# Altium PCB DiPho_digital.PcbDoc (part 1 of 3)
Units mm, origin at the board's own origin, x right, y up, seen from the top; angles counter-clockwise.
Board outline 25.2 x 25.2 mm, 4 copper layers (Top Layer, GND, Inner Layer 2, Bottom Layer), stack 1.562 mm thick; 68 components, 54 nets, 272 pads, 116 vias.
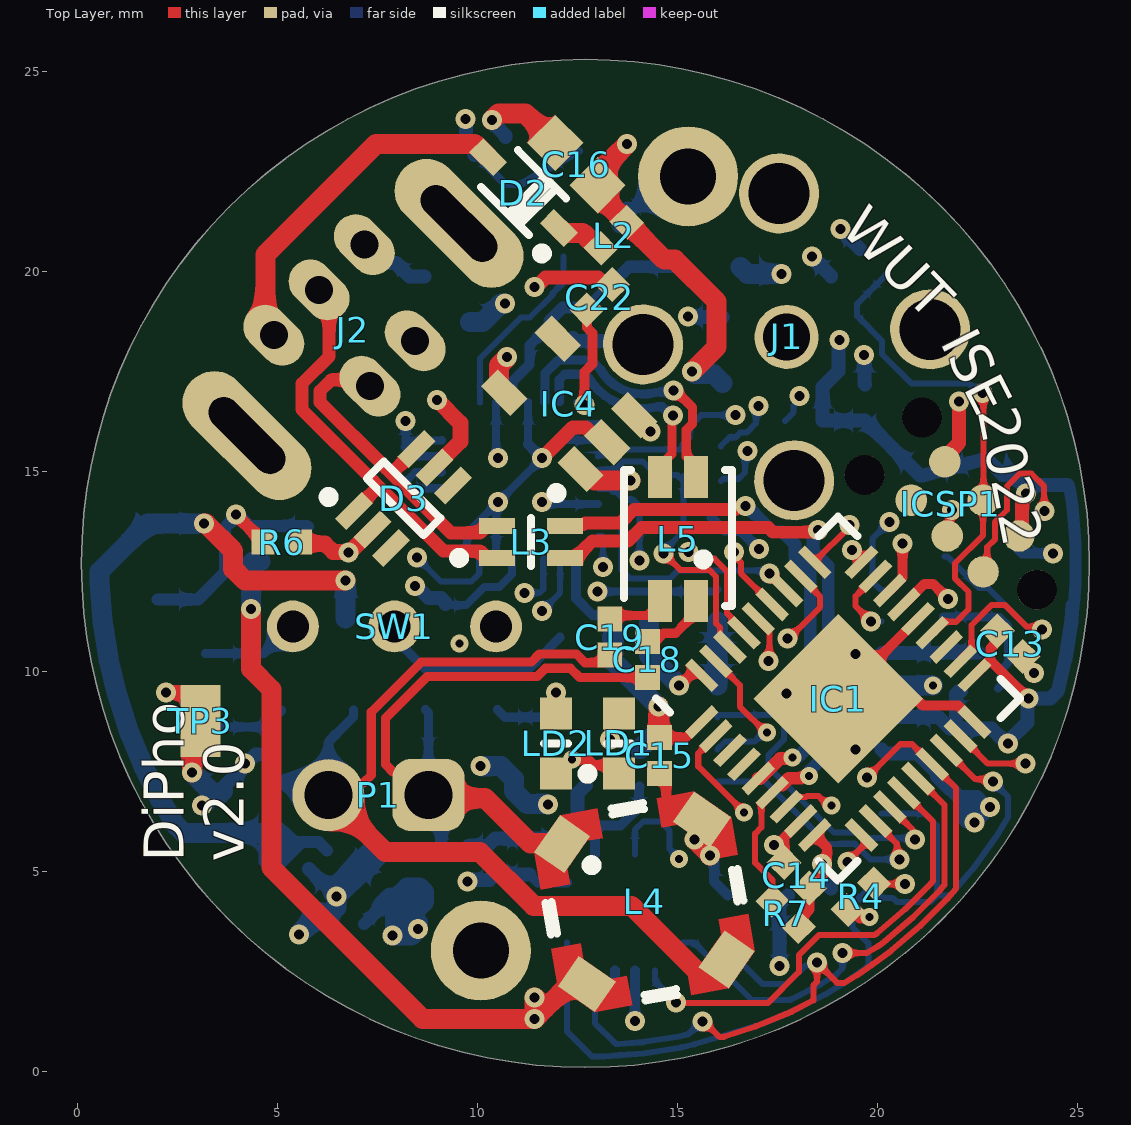
[diagram p0: Top Layer view]
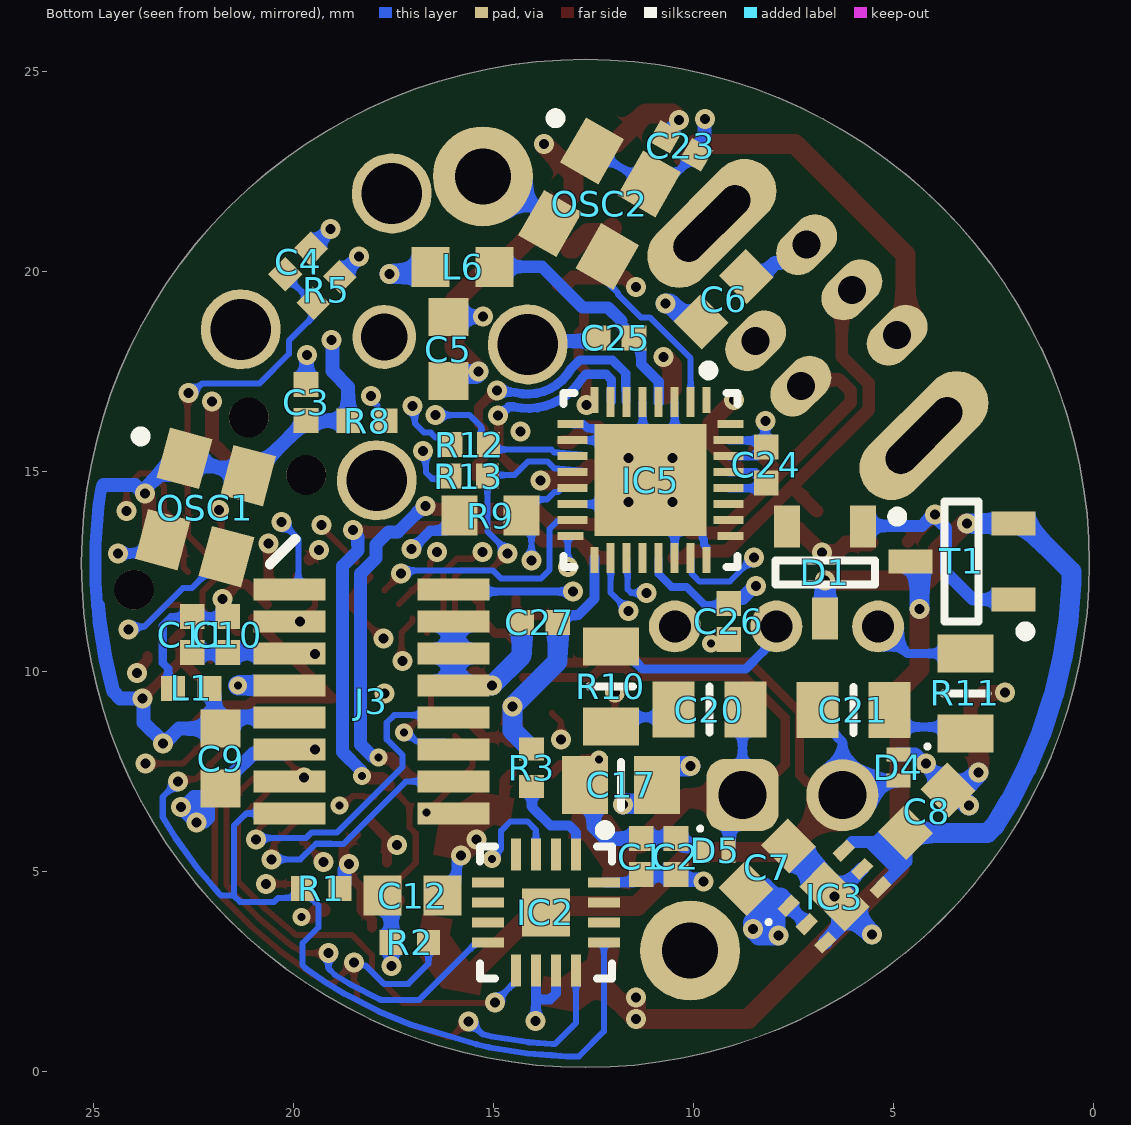
[diagram p1: Bottom Layer view, seen from below]
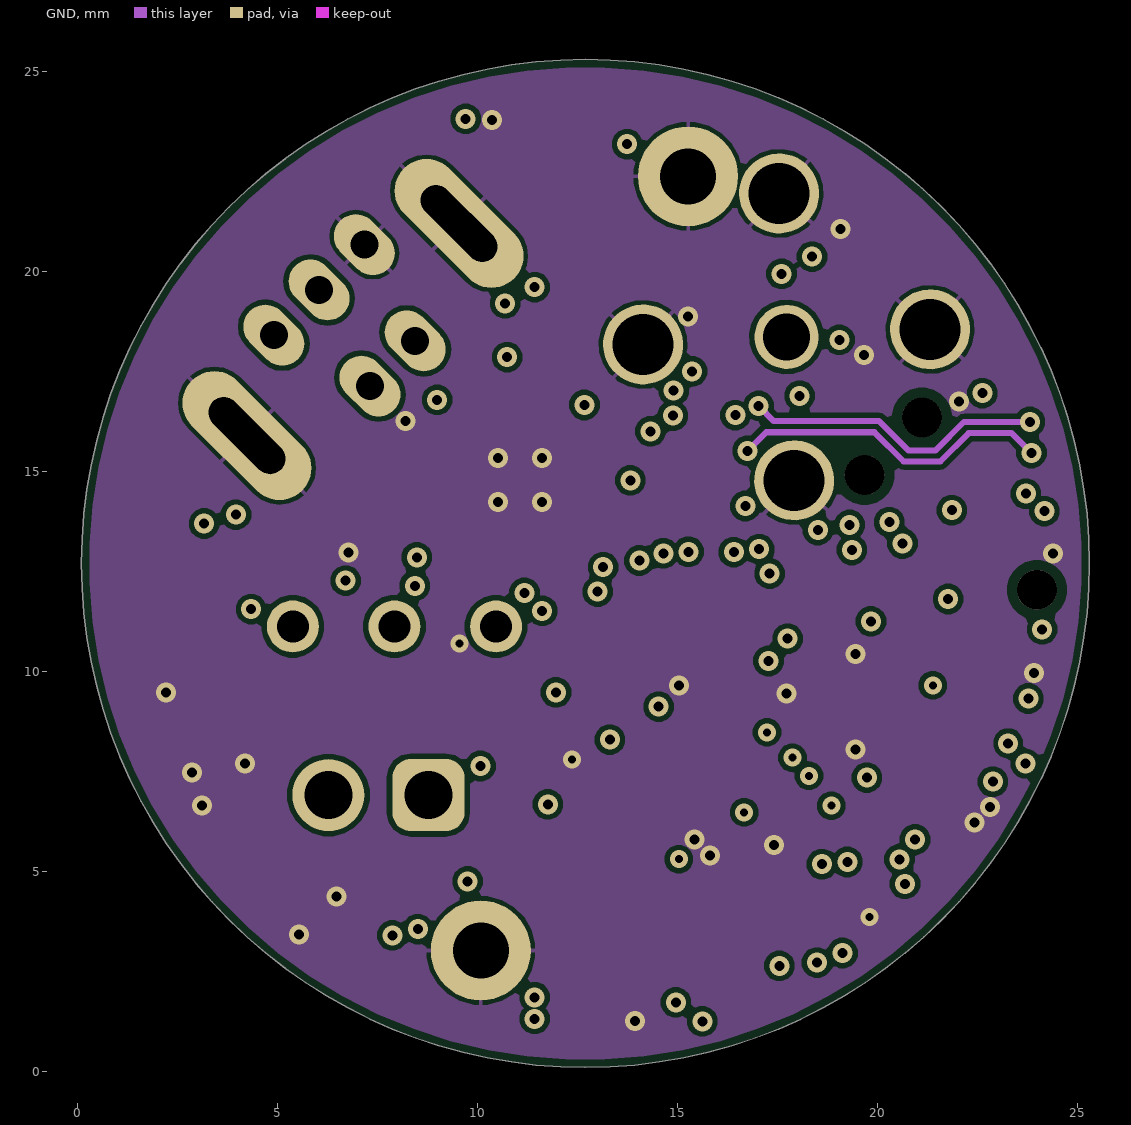
[diagram p2: GND]
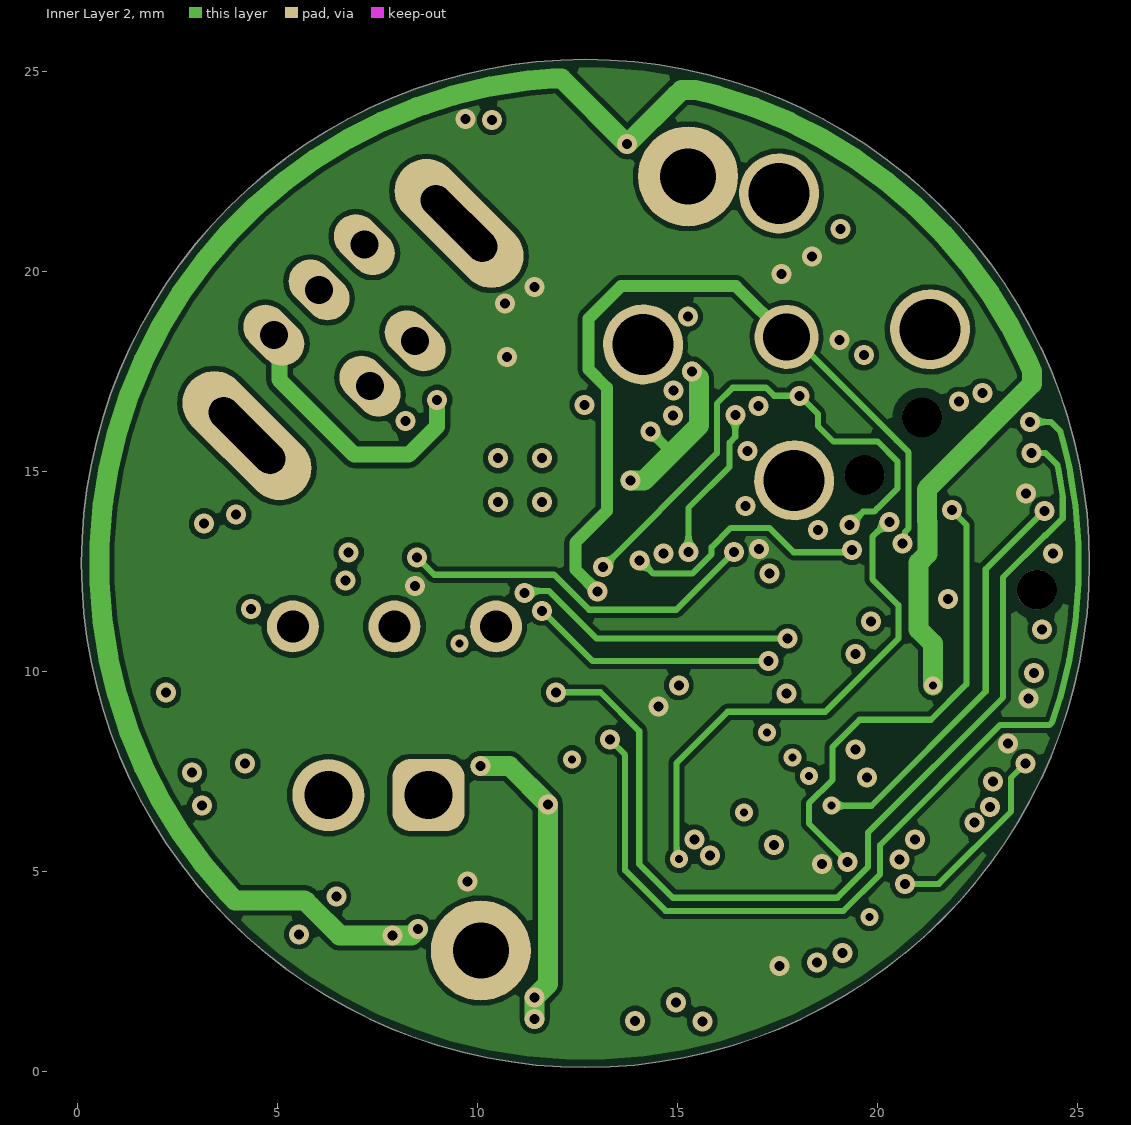
[diagram p3: Inner Layer 2]
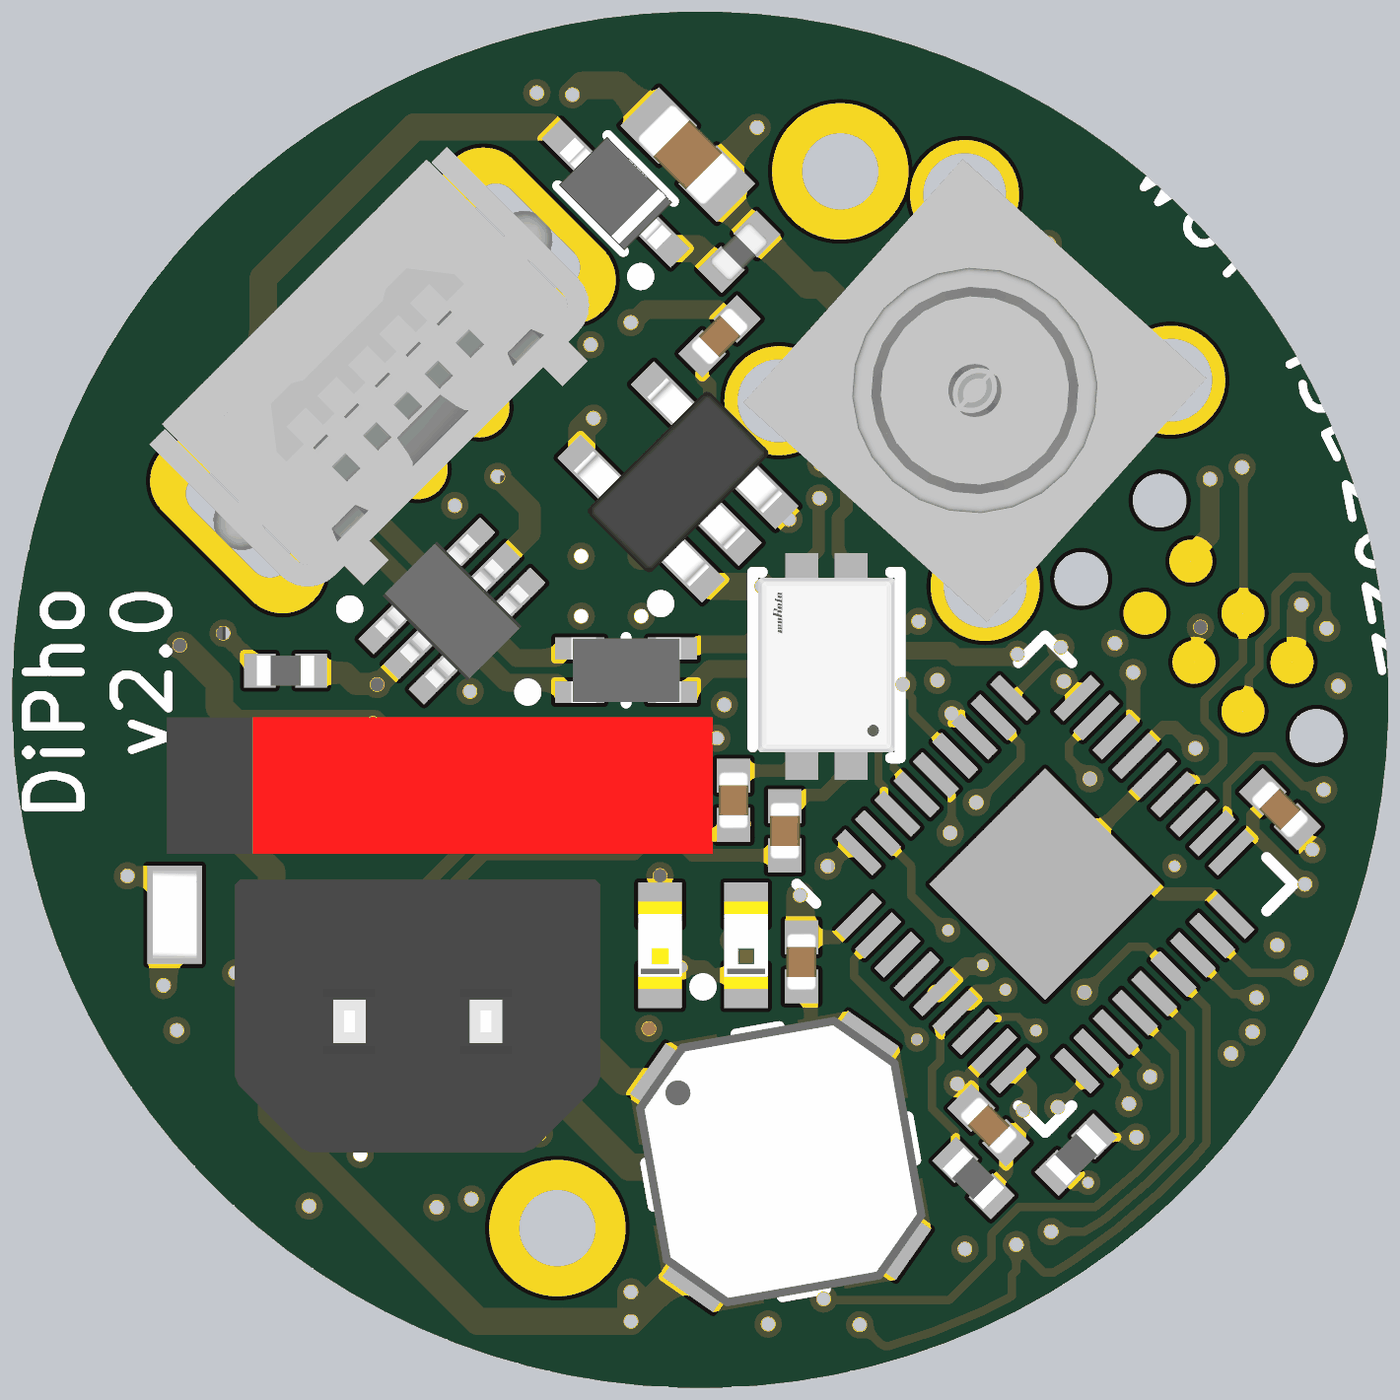
[diagram p5: 3D render of the assembled board from above, using the file's embedded part models]
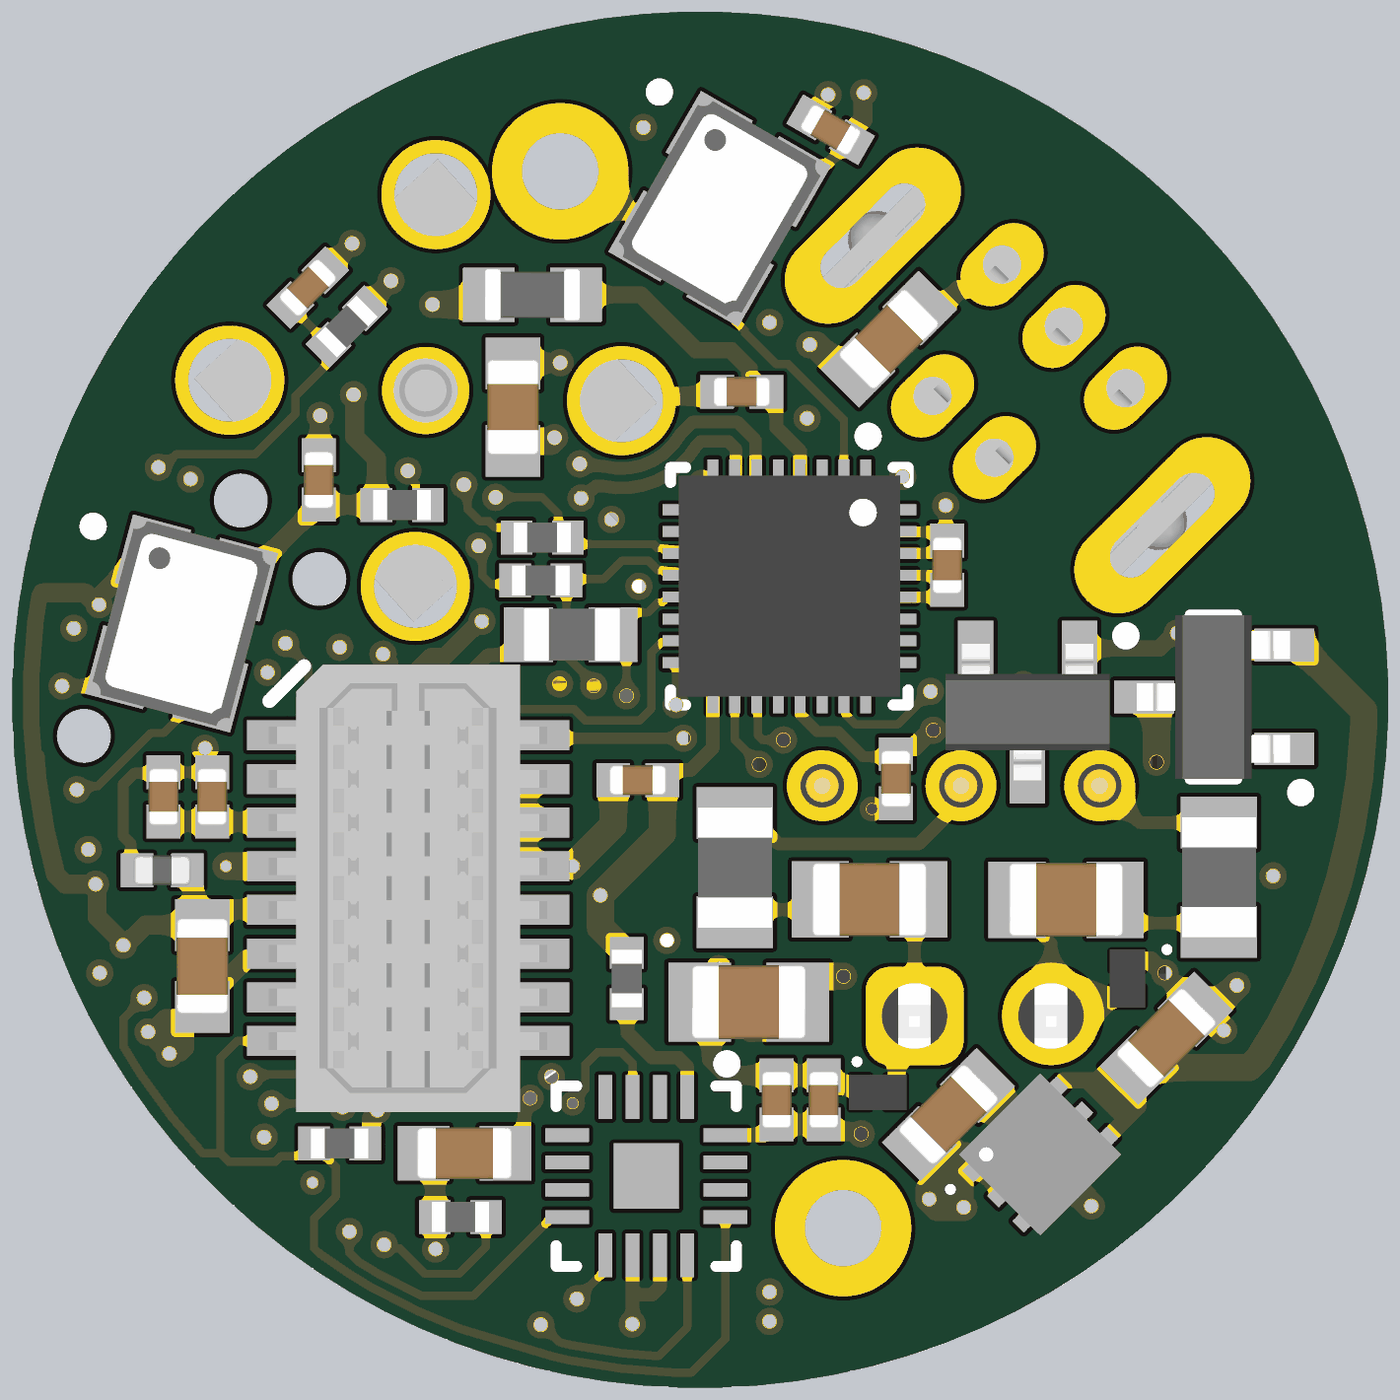
[diagram p6: 3D render of the assembled board from below, using the file's embedded part models]

## Layer stack, top to bottom
Top Solder: solder mask 0.0102, Solder Resist, Dk 3.5
Top Layer: signal copper 0.035
Dielectric 1: prepreg 0.356, PP-006, Dk 4.4
GND: signal copper 0.035
Dielectric 2: dielectric 0.71, FR-4, Dk 3.9
Inner Layer 2: signal copper 0.035
Dielectric 3: prepreg 0.356, PP-006, Dk 4.4
Bottom Layer: signal copper 0.035
Bottom Solder: solder mask 0.0102, Solder Resist, Dk 3.5

## Board outline
12.7,0.1 cw(c12.7,12.7) 0.1,12.7 cw(c12.7,12.7) 12.7,25.3 cw(c12.7,12.7) 25.3,12.7 cw(c12.7,12.7)

## Design rules (kind name [scope] priority, off if disabled: settings)
AcuteAngle [All] p1: minimum=6.00000000000000E+0001 checktracksonly=FALSE
BoardOutlineClearance [All] p1: gap=0.2 ignorepadtopadclearanceinfootprint=FALSE
Clearance Clearance_ViaInPadThermal [IsPad and InNet('GND') vs IsVia] p1: gap=0 ignorepadtopadclearanceinfootprint=FALSE except(-1: SMDPad-Via THPad-Via)
Clearance Clearance_ViaInPad [IsPad vs IsVia] p2: gap=0 ignorepadtopadclearanceinfootprint=FALSE except(0.01: SMDPad-Via)
Clearance [All] p3: gap=0.127 ignorepadtopadclearanceinfootprint=FALSE except(0.25: Arc-Hole Track-Hole SMDPad-Hole THPad-Hole Via-Hole Fill-Hole Poly-Hole Region-Hole Text-Hole)
ComponentClearance [All] p1: gap=0.102 collisioncheckmode=3 verticalgap=0.102 showdistances=TRUE
DiffPairsRouting "Schematic Differential Pairs Routing_9" [InNet('USBJ_D_P')] p1: maxlimit=0.127 minlimit=0.127 mostfreqgap=0.127 toplayer_minwidth=0.323 toplayer_maxwidth=0.323 toplayer_prefwidth=0.323 midlayer1_minwidth=0.14 midlayer1_maxwidth=0.14 midlayer1_prefwidth=0.14 midlayer2_minwidth=0.14 midlayer2_maxwidth=0.14 midlayer2_prefwidth=0.14 bottomlayer_minwidth=0.323 bottomlayer_maxwidth=0.323 bottomlayer_prefwidth=0.323 impedanceprofiledriven=TRUE impedanceprofileid={8D4277C8-22E8-44B8-81B9-C39E21E3F32A} impedanceprofilevalue=90.000000 maxuncoupledlength=2.54
DiffPairsRouting "Schematic Differential Pairs Routing_8" [InNet('USBJ_D_N')] p2: maxlimit=0.127 minlimit=0.127 mostfreqgap=0.127 toplayer_minwidth=0.323 toplayer_maxwidth=0.323 toplayer_prefwidth=0.323 midlayer1_minwidth=0.14 midlayer1_maxwidth=0.14 midlayer1_prefwidth=0.14 midlayer2_minwidth=0.14 midlayer2_maxwidth=0.14 midlayer2_prefwidth=0.14 bottomlayer_minwidth=0.323 bottomlayer_maxwidth=0.323 bottomlayer_prefwidth=0.323 impedanceprofiledriven=TRUE impedanceprofileid={8D4277C8-22E8-44B8-81B9-C39E21E3F32A} impedanceprofilevalue=90.000000 maxuncoupledlength=2.54
DiffPairsRouting "Schematic Differential Pairs Routing_7" [InNet('USBM_D_P')] p3: maxlimit=0.127 minlimit=0.127 mostfreqgap=0.127 toplayer_minwidth=0.323 toplayer_maxwidth=0.323 toplayer_prefwidth=0.323 midlayer1_minwidth=0.14 midlayer1_maxwidth=0.14 midlayer1_prefwidth=0.14 midlayer2_minwidth=0.14 midlayer2_maxwidth=0.14 midlayer2_prefwidth=0.14 bottomlayer_minwidth=0.323 bottomlayer_maxwidth=0.323 bottomlayer_prefwidth=0.323 impedanceprofiledriven=TRUE impedanceprofileid={8D4277C8-22E8-44B8-81B9-C39E21E3F32A} impedanceprofilevalue=90.000000 maxuncoupledlength=2.54
DiffPairsRouting "Schematic Differential Pairs Routing_6" [InNet('USBM_D_N')] p4: maxlimit=0.127 minlimit=0.127 mostfreqgap=0.127 toplayer_minwidth=0.323 toplayer_maxwidth=0.323 toplayer_prefwidth=0.323 midlayer1_minwidth=0.14 midlayer1_maxwidth=0.14 midlayer1_prefwidth=0.14 midlayer2_minwidth=0.14 midlayer2_maxwidth=0.14 midlayer2_prefwidth=0.14 bottomlayer_minwidth=0.323 bottomlayer_maxwidth=0.323 bottomlayer_prefwidth=0.323 impedanceprofiledriven=TRUE impedanceprofileid={8D4277C8-22E8-44B8-81B9-C39E21E3F32A} impedanceprofilevalue=90.000000 maxuncoupledlength=2.54
DiffPairsRouting "Schematic Differential Pairs Routing_5" [InNet('ETH_LINE_DCFILT_P')] p5: maxlimit=0.127 minlimit=0.127 mostfreqgap=0.127 toplayer_minwidth=0.231 toplayer_maxwidth=0.231 toplayer_prefwidth=0.231 midlayer1_minwidth=0.089 midlayer1_maxwidth=0.089 midlayer1_prefwidth=0.089 midlayer2_minwidth=0.089 midlayer2_maxwidth=0.089 midlayer2_prefwidth=0.089 bottomlayer_minwidth=0.231 bottomlayer_maxwidth=0.231 bottomlayer_prefwidth=0.231 impedanceprofiledriven=TRUE impedanceprofileid={9262DCC5-21B2-42F0-AE62-9C07079FD9D1} impedanceprofilevalue=100.000000 maxuncoupledlength=12.7
DiffPairsRouting "Schematic Differential Pairs Routing_4" [InNet('ETH_LINE_N')] p6: maxlimit=0.127 minlimit=0.127 mostfreqgap=0.127 toplayer_minwidth=0.231 toplayer_maxwidth=0.231 toplayer_prefwidth=0.231 midlayer1_minwidth=0.089 midlayer1_maxwidth=0.089 midlayer1_prefwidth=0.089 midlayer2_minwidth=0.089 midlayer2_maxwidth=0.089 midlayer2_prefwidth=0.089 bottomlayer_minwidth=0.231 bottomlayer_maxwidth=0.231 bottomlayer_prefwidth=0.231 impedanceprofiledriven=TRUE impedanceprofileid={9262DCC5-21B2-42F0-AE62-9C07079FD9D1} impedanceprofilevalue=100.000000 maxuncoupledlength=12.7
DiffPairsRouting "Schematic Differential Pairs Routing_3" [InNet('ETH_LINE_P')] p7: maxlimit=0.127 minlimit=0.127 mostfreqgap=0.127 toplayer_minwidth=0.231 toplayer_maxwidth=0.231 toplayer_prefwidth=0.231 midlayer1_minwidth=0.089 midlayer1_maxwidth=0.089 midlayer1_prefwidth=0.089 midlayer2_minwidth=0.089 midlayer2_maxwidth=0.089 midlayer2_prefwidth=0.089 bottomlayer_minwidth=0.231 bottomlayer_maxwidth=0.231 bottomlayer_prefwidth=0.231 impedanceprofiledriven=TRUE impedanceprofileid={9262DCC5-21B2-42F0-AE62-9C07079FD9D1} impedanceprofilevalue=100.000000 maxuncoupledlength=12.7
DiffPairsRouting "Schematic Differential Pairs Routing_2" [InNet('ETH_LINE_CFILT_P')] p8: maxlimit=0.127 minlimit=0.127 mostfreqgap=0.127 toplayer_minwidth=0.231 toplayer_maxwidth=0.231 toplayer_prefwidth=0.231 midlayer1_minwidth=0.089 midlayer1_maxwidth=0.089 midlayer1_prefwidth=0.089 midlayer2_minwidth=0.089 midlayer2_maxwidth=0.089 midlayer2_prefwidth=0.089 bottomlayer_minwidth=0.231 bottomlayer_maxwidth=0.231 bottomlayer_prefwidth=0.231 impedanceprofiledriven=TRUE impedanceprofileid={9262DCC5-21B2-42F0-AE62-9C07079FD9D1} impedanceprofilevalue=100.000000 maxuncoupledlength=12.7
DiffPairsRouting "Schematic Differential Pairs Routing_1" [InNet('ETH_LINE_CFILT_N')] p9: maxlimit=0.127 minlimit=0.127 mostfreqgap=0.127 toplayer_minwidth=0.231 toplayer_maxwidth=0.231 toplayer_prefwidth=0.231 midlayer1_minwidth=0.089 midlayer1_maxwidth=0.089 midlayer1_prefwidth=0.089 midlayer2_minwidth=0.089 midlayer2_maxwidth=0.089 midlayer2_prefwidth=0.089 bottomlayer_minwidth=0.231 bottomlayer_maxwidth=0.231 bottomlayer_prefwidth=0.231 impedanceprofiledriven=TRUE impedanceprofileid={9262DCC5-21B2-42F0-AE62-9C07079FD9D1} impedanceprofilevalue=100.000000 maxuncoupledlength=12.7
DiffPairsRouting "Schematic Differential Pairs Routing" [InNet('ETH_LINE_DCFILT_N')] p10: maxlimit=0.127 minlimit=0.127 mostfreqgap=0.127 toplayer_minwidth=0.231 toplayer_maxwidth=0.231 toplayer_prefwidth=0.231 midlayer1_minwidth=0.089 midlayer1_maxwidth=0.089 midlayer1_prefwidth=0.089 midlayer2_minwidth=0.089 midlayer2_maxwidth=0.089 midlayer2_prefwidth=0.089 bottomlayer_minwidth=0.231 bottomlayer_maxwidth=0.231 bottomlayer_prefwidth=0.231 impedanceprofiledriven=TRUE impedanceprofileid={9262DCC5-21B2-42F0-AE62-9C07079FD9D1} impedanceprofilevalue=100.000000 maxuncoupledlength=12.7
DiffPairsRouting [All] p11: maxlimit=0.102 minlimit=0.102 mostfreqgap=0.102 toplayer_minwidth=0.102 toplayer_maxwidth=1816.048 toplayer_prefwidth=0.102 midlayer1_minwidth=0.102 midlayer1_maxwidth=1816.048 midlayer1_prefwidth=0.102 midlayer2_minwidth=0.102 midlayer2_maxwidth=1816.048 midlayer2_prefwidth=0.102 bottomlayer_minwidth=0.102 bottomlayer_maxwidth=1816.048 bottomlayer_prefwidth=0.102 maxuncoupledlength=12.7
Height [All] p1: minheight=0 maxheight=1816.048 prefheight=12.7
HoleSize [All] p1: absolutevalues=TRUE maxlimit=6.3 minlimit=0.2 maxpercent=80.000 minpercent=20.000
HoleToHoleClearance [All] p1: gap=0.25 allowstackedmicrovias=FALSE
MinimumAnnularRing [All] p1: minimumring=0.076
MinimumSolderMaskSliver [All] p1: minsoldermaskwidth=0
PlaneClearance [All] p1: clearance=0.102
PlaneConnect PlaneConnectPowerPads [InPadClass('PowerPads')] p1: planeconnectstyle=Direct reliefexpansion=0.508 reliefentries=4 reliefconductorwidth=0.254 reliefairgap=0.254
PlaneConnect [All] p2: pad.planeconnectstyle=Relief pad.reliefexpansion=0.3 pad.reliefentries=4 pad.reliefconductorwidth=0.102 pad.reliefairgap=0.102 via.planeconnectstyle=Direct via.reliefexpansion=0.3 via.reliefentries=4 via.reliefconductorwidth=0.127 via.reliefairgap=0.127
PolygonConnect PolygonConnectPowerPads [All vs (InPadClass('PowerPads'))] p1: connectstyle=Direct reliefconductorwidth=0.254 reliefentries=4 polygonreliefangle="90 Angle" airgapwidth=0.254
PolygonConnect [All] p2: thpad.connectstyle=Relief thpad.reliefconductorwidth=0.102 thpad.reliefentries=4 thpad.polygonreliefangle="90 Angle" thpad.airgapwidth=0.102 smdpad.connectstyle=Direct smdpad.reliefconductorwidth=0.102 smdpad.reliefentries=4 smdpad.polygonreliefangle="90 Angle" smdpad.airgapwidth=0.102 via.connectstyle=Direct via.reliefconductorwidth=0.127 via.reliefentries=4 via.polygonreliefangle="90 Angle" via.airgapwidth=0.127
RoutingVias [All] p1: holewidth=0.25 width=0.5 viastyle="Through Hole" minholewidth=0.25 minwidth=0.5 maxholewidth=6.3 maxwidth=6.55
SilkToSilkClearance [All] p1: silktosilkclearance=0
SilkToSolderMaskClearance [IsPad] p1: minsilkscreentomaskgap=0.102 clearancetoexposedcopper=TRUE
SolderMaskExpansion [IsVia] p1: expansion=0.075 istentingtop=TRUE
SolderMaskExpansion SolderMaskExpansion_Via [All] p2: expansion=0.075 istentingtop=FALSE
Width [All] p1: maxlimit=1816.048 minlimit=0.152 preferedwidth=0.254
20 further rules are at their usual default settings.

## Classes and differential pairs
component class "B2B Connector": J3
component class "MCU and IO": C1 C2 C3 C4 C5 C6 C7 C8 C9 C10 C11 C12 C13 C14 C15 C16 D1 D2 D3 IC1 IC2 IC3 IC4 ICSP1 J1 J2 L1 L2 L3 OSC1 R1 R2 R3 R4 R5 R6 R7 T1 TP3
component class "Ethernet Controller and Magnetics": C17 C18 C19 C20 C21 C22 C23 C24 C25 C26 C27 D4 D5 IC5 L4 L5 L6 LD1 LD2 OSC2 P1 R8 R9 R10 R11 R12 R13 SW1
differential pair ETH_LINE: +ETH_LINE_P -ETH_LINE_N
differential pair ETH_LINE_DCFILT: +ETH_LINE_DCFILT_P -ETH_LINE_DCFILT_N
differential pair ETH_LINE_CFILT: +ETH_LINE_CFILT_P -ETH_LINE_CFILT_N
differential pair USBM_D: +USBM_D_P -USBM_D_N
differential pair USBJ_D: +USBJ_D_P -USBJ_D_N

## Components (designator, comment, footprint, x,y, rotation, side; value= is the part's Value field where it differs from the comment)
C1 "10nF" CAPC1005X55N 11.303,5.372 r270 bottom
C2 "100nF" CAPC1005X55N 10.439,5.372 r270 bottom
C3 "100nF" CAPC1005X55N 19.685,16.726 r270 bottom
C4 "100nF" CAPC1005X55N 19.886,20.246 r315 bottom
C5 "1uF" CAPC1608X87N 16.129,18.059 r270 bottom
C6 "1uF" CAPC1608X87N 9.246,19.304 r315 bottom
C7 "4.7uF" CAPC1709X95N 8.153,5.105 r315 bottom
C8 "4.7uF" CAPC1709X95N 4.166,6.502 r315 bottom
C9 "4.7uF" CAPC1709X95N 21.819,7.823 r90 bottom
C10 "1uF" CAPC1005X55N 21.641,10.922 r90 bottom
C11 "10nF" CAPC1005X55N 22.53,10.922 r90 bottom
C12 "4.7uF" CAPC1709X95N 17.018,4.394 r0 bottom
C13 "100nF" CAPC1005X55N 23.317,10.693 r135 top
C14 "100nF" CAPC1005X55N 17.983,4.902 r315 top
C15 "100nF" CAPC1005X55N 14.554,7.899 r90 top
C16 "10uF" CAPC1608X80N 12.471,22.682 r315 top
C17 "10uF" CAPC2012X145N 11.811,7.163 r180 bottom
C18 "100nF" CAPC1005X55N 14.249,10.3 r270 top
C19 "100nF" CAPC1005X55N 13.31,10.859 r270 top
C20 "220nF" CAPC2012X135N 9.601,9.042 r180 bottom
C21 "220nF" CAPC2012X135N 6,9.039 r0 bottom
C22 "2.2uF" CAPC1005X55N 13.056,19.355 r225 top
C23 "100nF" CAPC1005X55N 10.312,23.139 r210 bottom
C24 "2.2uF" CAPC1005X55N 8.179,15.164 r270 bottom
C25 "2.2uF" CAPC1005X55N 11.938,18.339 r180 bottom
C26 "100nF" CAPC1005X55N 9.119,11.252 r90 bottom
C27 "100nF" CAPC1005X55N 13.843,11.227 r180 bottom
D1 "BZX84C7V5" SOT95P240X130-3N 6.706,12.471 r270 bottom
D2 "BAT54HT1G" SOD2513X100N 11.151,21.971 r135 top
D3 "DRTR5V0U4S-7" SOT65P210X110-6N 8.153,14.326 r45 top
D4 "ESD7241N2T5G" DFN65P100X40-2N 4.877,7.595 r270 bottom
D5 "ESD7241N2T5G" DFN65P100X40-2N 9.449,5.512 r180 bottom
IC1 "STM32F103T8U6" STM-VFQFPN36_L 19.016,9.321 r225 top
IC2 "MCP47CMB02-E/MG" QFN127P600-8N 13.688,3.976 r270 bottom
IC3 "TLV76750DRVR" SON65P200X80_HS-7N 6.473,4.372 r135 bottom
IC4 "NCP115ASN330T2G" SOT95P275X110-5N 12.294,16.688 r135 top
IC5 "NCN26010XMNTXG" QFN40P400X400X100_HS-33N 11.069,14.78 r270 bottom
ICSP1 "TC2030-IDC-NL" TC2030-IDC-NL 23.987,12.039 r135 top
J1 "0733660062" 73366-0062 17.729,18.364 r48 top
J2 "5022370517" 502237-0517 6.96,18.618 r225 top
J3 "53307-1671" 533071671 18.05,9.25 r180 bottom locked
L1 "600R@100MHz" INDC1005X55N 22.555,9.576 r0 bottom
L2 "600R@100MHz" INDC1005X55N 13.411,20.904 r45 top
L3 "90R@100MHz" IND_MURATA_DLW21S 11.342,13.24 r0 top
L4 "150uH" IND_COILCRAFT_LPD5030 14.173,4.242 r10 top
L5 "DLW32MH201XK2L" FP-DLW32MH201XK2L-MFG 15.011,13.335 r90 top value=200uH
L6 "1k@100MHz" INDC1608X100N 15.773,20.117 r180 bottom
LD1 "Green" LED_LITEON_LTST-C193KGKT-5A 13.538,8.204 r90 top
LD2 "Yellow" LED_LITEON_LTST-C193KSKT-5A 11.963,8.204 r90 top
OSC1 "8MHz" OSC_ABRACON_ASE 22.2,14.097 r195 bottom
OSC2 "25MHz" OSC_ABRACON_ASE 12.344,21.692 r210 bottom
P1 "691347000002B" 691347000002B 7.525,6.909 r180 top
R1 "4k7" RESC1005X40N 19.304,4.572 r180 bottom
R2 "4k7" RESC1005X40N 17.094,3.226 r0 bottom
R3 "100k" RESC1005X40N 14.046,7.595 r90 bottom
R4 "100k" RESC1005X40N 19.583,4.369 r225 top
R5 "100k" RESC1005X40N 19.174,19.536 r135 bottom
R6 "1k5" RESC1005X40N 5.105,13.233 r180 top
R7 "1k5" RESC1005X40N 17.704,3.937 r315 top
R8 "10k" RESC1005X40N 18.161,16.268 r0 bottom
R9 "3k3" RESC1608X55N 15.049,13.894 r0 bottom
R10 "49R9" RESC2012X60N 12.065,9.627 r270 bottom
R11 "49R9" RESC2012X60N 3.2,9.45 r270 bottom
R12 "3k3" RESC1005X40N 15.596,15.672 r0 bottom
R13 "2k" RESC1005X40N 15.621,14.884 r0 bottom
SW1 "450301014042" 450301014042 7.925,11.125 r180 top
T1 "DMP2066LSN-7" SOT95P285X140-3N 3.302,12.751 r0 bottom
TP3 "S2761-46R" S2761-46R 3.073,8.763 r270 top

## Footprints (in the part's own frame and the unit in brackets; to place one, negate y for a bottom-side part, rotate by r counter-clockwise, add the part's x,y. Pads: shape width x height; smd on the part's side, far side on the other; paste and mask are expansions set on the pad)
73366-0062 [mm] "MCX jack vertical PCB TH 50 ohms"
  round 2 hole 1.52: C1(-2.54,2.54) C2(2.54,2.54) C3(2.54,-2.54) C4(-2.54,-2.54)
  round 1.6 hole 1.17: H(0,0)
  body extent -3,-3 3,3, height 5.6
502237-0517 [mm] "USB series mini-B straight receptacle assembly"
  rrect100% 1.1x1.7 hole 0.7: D+(0,-1.3) D-(0.8,1.3) GND(-1.6,-1.3) ID(-0.8,1.3) VBUS(1.6,-1.3)
  rrect100% 1.6x3.9 hole 0.762 slot 2.4 at 90 deg: SH1(-3.65,0) SH2(3.85,0)
  body extent -4.08,-2.3 4.27,2.4, height 7.75
533071671 [mm] "Molex Slim Stack, 0.80mm pitch, 20ckt"
  rect 1.8x0.55 smd: 1(2.05,2.8) 2(2.05,2) 3(2.05,1.2) 4(2.05,0.4) 5(2.05,-0.4) 6(2.05,-1.2) 7(2.05,-2) 8(2.05,-2.8) 9(-2.05,-2.8) 10(-2.05,-2) 11(-2.05,-1.2) 12(-2.05,-0.4) 13(-2.05,0.4) 14(-2.05,1.2) 15(-2.05,2) 16(-2.05,2.8)
  silkscreen extent -2.54,3.43 -1.9,4.06, body extent -2.55,-4.1 2.55,4.1, height 3.67
450301014042 [mm] "THT Mini Slide Switch, body 10x2.5mm"
  round 1.3 hole 0.8: COM(0,0) L1(2.54,0) L2(-2.54,0)
  body extent -5,-1.25 5,1.25, height 6.43
691347000002B [mm] "Terminal block - PCB  Header, pitch 2.5mm, 2p"
  rrect50% 1.8x1.8 hole 1.2: 1(-1.25,0)
  round 1.8 hole 1.2: 2(1.25,0)
  body extent -3.35,-2.5 3.35,2.5, height 7.55
CAPC1005X55N [mm] "Capacitor, Non-Polarized, Chip; 1.00mm L X 0.50mm W X 0.70mm H, IPC Medium Density"
  rect 0.62x0.62 smd: 1(-0.45,0) 2(0.45,0)
  body extent -0.52,-0.27 0.53,0.28, height 0.55
CAPC1608X80N [mm] "Chip Capacitor, Body 1.6x0.8mm IPC Medium Density"
  rect 1x1 smd: 1(-0.75,0) 2(0.75,0)
  body extent -0.87,-0.47 0.88,0.48, height 0.8
CAPC1608X87N [mm] "Chip Capacitor, Body 1.6x0.8mm IPC Medium Density"
  rect 0.95x1 smd: 1(-0.8,0) 2(0.8,0)
  body extent -0.87,-0.47 0.88,0.48, height 0.87
CAPC1709X95N [mm] "Capacitor, non-Polarized, Chip; 1.65mm L X 0.85mm W X 0.95mm H,IPC Medium Density"
  rect 0.95x1 smd: 1(-0.75,0) 2(0.75,0)
  body extent -0.87,-0.47 0.88,0.48, height 0.95
CAPC2012X135N [mm] "Chip Capacitor, Body 2.0x1.25mm, IPC Medium Density"
  rect 1.05x1.4 smd: 1(-0.9,0) 2(0.9,0)
  silkscreen extent 0,-0.58 0,0.58, body extent -1.05,-0.67 1.05,0.68, height 1.25
CAPC2012X145N [mm] "Chip Capacitor, Body 2.0x1.45mm, IPC Medium Density"
  rect 1.15x1.45 smd: 1(-0.9,0) 2(0.9,0)
  silkscreen extent 0,-0.58 0,0.58, body extent -1.05,-0.67 1.05,0.68, height 1.45
DFN65P100X40-2N [mm] "DFN, 2-Leads, Body 0,60x1,00mm, Pitch 0,65mm, IPC Medium Density"
  rect 0.35x0.6 smd: 1(-0.325,0) 2(0.325,0)
  silkscreen extent -0.58,0.67 -0.48,0.77, body extent -0.53,-0.33 0.53,0.33, height 0.4
FP-DLW32MH201XK2L-MFG [mm]
  rect 1.05x0.6 smd paste+0 mask+0: 1(-1.575,-0.45) 2(1.525,-0.45) 3(1.525,0.45) 4(-1.575,0.45)
  silkscreen extent -1.7,-1.35 1.7,1.35, body extent -2.15,-1.45 2.15,1.45, height 0.25
IND_COILCRAFT_LPD5030 [mm] "Shielded Coupled Inductor, Body Width 5mm Body Lenght 5mm Height 2.9mm, LPD5030 Series"
  rect 0.919x1.131 smd rot 135: 1(-1.775,1.775) 3(1.775,-1.775)
  rect 1.131x0.919 smd rot 135: 2(-1.775,-1.775) 4(1.775,1.775)
  Top Layer region: -2.5,0.75 -1.75,0.75 -1.75,1.15 -1.15,1.75 -0.75,1.75 -0.75,2.5 -1.7,2.5 -2.5,1.7
  Top Layer region: 0.75,2.5 1.7,2.5 2.5,1.7 2.5,0.75 1.75,0.75 1.75,1.15 1.15,1.75 0.75,1.75
  Top Layer region: 2.5,-0.75 2.5,-1.7 1.7,-2.5 0.75,-2.5 0.75,-1.75 1.15,-1.75 1.75,-1.15 1.75,-0.75
  Top Layer region: -0.75,-2.5 -0.75,-1.75 -1.15,-1.75 -1.75,-1.15 -1.75,-0.75 -2.5,-0.75 -2.5,-1.7 -1.7,-2.5
  silkscreen extent -2.44,-2.44 2.44,2.44, body extent -2.44,-2.44 2.44,2.44, height 2.98
IND_MURATA_DLW21S [mm] "Common Mode Choke Coil, DLW21S Series - Body 2 x 1.2mm"
  rect 0.9x0.4 smd: 1(-0.85,-0.4) 2(0.85,-0.4) 3(0.85,0.4) 4(-0.85,0.4)
  silkscreen extent -1.92,-0.6 0,0.6, body extent -1,-0.6 1,0.6, height 1.4
INDC1005X55N [mm] "Chip Inductor, 2-Leads, EIA 0402, Metric 1005, Body 1x0.5mm, 0402IPC Medium Density"
  rect 0.6x0.62 smd: 1(-0.46,0) 2(0.46,0)
  body extent -0.52,-0.27 0.53,0.28, height 0.55
INDC1608X100N [mm] "Chip Inductor, 2-Leads, EIA 0603, Metric 1608, Body 1.6x0.8mm, IPC Medium Density"
  rect 0.95x1 smd: 1(-0.8,0) 2(0.8,0)
  body extent -0.87,-0.47 0.88,0.48, height 1
LED_LITEON_LTST-C193KGKT-5A [mm] "SMD AlInGaP Green LED, Lens Water Clear, 2-Leads, Body 1.6x0.8mm"
  rect 0.8x0.8 smd: 1(-0.75,0) 2(0.75,0)
  silkscreen extent -0.89,-0.3 0,0.91, body extent -0.8,-0.4 0.8,0.4, height 0.35
LED_LITEON_LTST-C193KSKT-5A [mm] "SMD AlInGaP Yellow LED, Lens Water Clear, 2-Leads, Body 1.6x0.8mm"
  rect 0.8x0.8 smd: 1(-0.75,0) 2(0.75,0)
  silkscreen extent -0.89,-0.91 0,0.3, body extent -0.8,-0.4 0.8,0.4, height 0.35
OSC_ABRACON_ASE [mm] "SMD Oscillator, Body 3.20mm L X 2.50mm W X 1.20mm H, ASE Serie"
  rect 1.1x1.3 smd: 1(-0.825,1.05) 2(-0.825,-1.05) 3(0.825,-1.05) 4(0.825,1.05)
  silkscreen extent -2.15,1.18 -1.9,1.42, body extent -1.3,-1.65 1.3,1.65, height 1.2
QFN40P400X400X100_HS-33N [mm] "QFN, 32-Leads, Body 4,00x4,00mm, Pitch 0,40mm, Thermal Pad 2,80x2,80mm, IPC Medium Density"
  rect 0.65x0.2 smd: 1(-2,1.4) 8(-2,-1.4) 17(2,-1.4) 24(2,1.4)
  rect 0.75x0.2 smd: 2(-1.95,1) 3(-1.95,0.6) 4(-1.95,0.2) 5(-1.95,-0.2) 6(-1.95,-0.6) 7(-1.95,-1) 18(1.95,-1) 19(1.95,-0.6) 20(1.95,-0.2) 21(1.95,0.2) 22(1.95,0.6) 23(1.95,1)
  rect 0.2x0.65 smd: 9(-1.4,-2) 16(1.4,-2) 25(1.4,2) 32(-1.4,2)
  rect 0.2x0.75 smd: 10(-1,-1.95) 11(-0.6,-1.95) 12(-0.2,-1.95) 13(0.2,-1.95) 14(0.6,-1.95) 15(1,-1.95) 26(1,1.95) 27(0.6,1.95) 28(0.2,1.95) 29(-0.2,1.95) 30(-0.6,1.95) 31(-1,1.95)
  rect 2.8x2.8 smd: 33(0,0)
  silkscreen extent -2.87,-2.17 2.17,2.18, body extent -2.03,-2.03 2.03,2.03, height 1
QFN127P600-8N [mm]
  rect 0.8x0.25 smd: 1(-1.45,0.75) 2(-1.45,0.25) 3(-1.45,-0.25) 4(-1.45,-0.75) 9(1.45,-0.75) 10(1.45,-0.25) 11(1.45,0.25) 12(1.45,0.75)
  rect 0.25x0.8 smd: 5(-0.75,-1.45) 6(-0.25,-1.45) 7(0.25,-1.45) 8(0.75,-1.45) 13(0.75,1.45) 14(0.25,1.45) 15(-0.25,1.45) 16(-0.75,1.45)
  rect 1.2x1.2 smd: 17(0,0)
  silkscreen extent -2.18,-1.65 1.65,1.65, body extent -1.5,-1.5 1.5,1.5, height 0.9
RESC1005X40N [mm] "Chip Resistor, EIA 0402, Metric 1005, Body 1.0x0.5mm, IPC Medium Density"
  rect 0.58x0.62 smd: 1(-0.47,0) 2(0.47,0)
  body extent -0.52,-0.27 0.53,0.28, height 0.4
RESC1608X55N [mm] "Chip Resistor, EIA 0603, Metric 1608, Body 1.6x0.8mm, IPC Medium Density"
  rect 0.9x1 smd: 1(-0.75,0) 2(0.8,0)
  body extent -0.87,-0.47 0.88,0.48, height 0.55
RESC2012X60N [mm] "Chip Resistor, EIA 0805, Metric 2012, Body 2.0x1.2mm, IPC Medium Density"
  rect 0.95x1.4 smd: 1(-1,0) 2(1,0)
  silkscreen extent 0,-0.55 0,0.55, body extent -1.1,-0.67 1.1,0.68, height 0.6
S2761-46R [mm]
  rect 1.8x1 smd: 1(0,0)
  body extent -0.8,-0.4 0.8,0.4, height 1.17
SOD2513X100N [mm] "SOD-323 Diode; 1.70mm W X 1.25mm L X 1.00mm H Body, IPC Medium Density"
  rect 0.85x0.5 smd: 1(-1.25,0) 2(1.25,0)
  silkscreen extent -1.52,-0.65 0.85,0.87, body extent -1.25,-0.62 1.25,0.63, height 1
SON65P200X80_HS-7N [mm] "SON, 6-Leads, Body 2,00x2,00mm, Pitch 0,65mm, Thermal Pad 1,60x0,89mm, IPC Medium Density"
  rect 0.5x0.3 smd: 1(-0.975,0.65) 2(-0.975,0) 3(-0.975,-0.65) 4(0.975,-0.65) 5(0.975,0) 6(0.975,0.65)
  rect 0.89x1.6 smd: EP(0,0)
  silkscreen extent -1.67,0.66 -1.57,0.76, body extent -1.05,-1.05 1.05,1.05, height 0.8
SOT65P210X110-6N [mm]
  rect 0.95x0.4 smd: 1(-1.1,0.65) 2(-1.1,0) 3(-1.1,-0.65) 4(1.1,-0.65) 5(1.1,0) 6(1.1,0.65)
  silkscreen extent -1.42,-1 0.3,1.47, body extent -1.2,-1.1 1.2,1.1, height 1.1
SOT95P240X130-3N [mm] "SOT23 3-Leads, Pitch 0.95mm - Body 1.3x2.9mm, IPC Medium Density"
  rect 1.05x0.65 smd: 1(-1.15,0.95) 2(-1.15,-0.95) 3(1.15,0)
  silkscreen extent -1.52,-1.24 0.3,1.92, body extent -1.25,-1.5 1.25,1.5, height 1.3
SOT95P275X110-5N [mm] "SOT23, 5-Leads, Body 3,00x2,75mm, Pitch 0,95mm, IPC Medium Density"
  rect 1.05x0.6 smd: 1(-1.35,0.95) 2(-1.35,0) 3(-1.35,-0.95) 4(1.35,-0.95) 5(1.35,0.95)
  silkscreen extent -1.47,1.68 -1.23,1.92, body extent -1.5,-1.58 1.5,1.58, height 1.1
SOT95P285X140-3N [mm] "SOT23, 0.95mm Pitch; 3 Pin, 1.6mm W X 3mm L X 1.4mm H Body, IPC Medium Density"
  rect 1.1x0.6 smd: 1(-1.3,0.95) 2(-1.3,-0.95) 3(1.27,0)
  silkscreen extent -1.72,-1.5 0.43,1.87, body extent -1.4,-1.5 1.4,1.5, height 1.4
STM-VFQFPN36_L [mm] "QFN, 36-Leads, Body 6.13x6.13mm, Pitch 0.5mm, Thermal Pad 3x3mm, IPC High Density"
  rect 0.95x0.25 smd: 1(-2.825,2) 2(-2.825,1.5) 3(-2.825,1) 4(-2.825,0.5) 5(-2.825,0) 6(-2.825,-0.5) 7(-2.825,-1) 8(-2.825,-1.5) 9(-2.825,-2) 19(2.825,-2) 20(2.825,-1.5) 21(2.825,-1) 22(2.825,-0.5) 23(2.825,0) 24(2.825,0.5) 25(2.825,1) 26(2.825,1.5) 27(2.825,2)
  rect 0.25x0.95 smd: 10(-2,-2.825) 11(-1.5,-2.825) 12(-1,-2.825) 13(-0.5,-2.825) 14(0,-2.825) 15(0.5,-2.825) 16(1,-2.825) 17(1.5,-2.825) 18(2,-2.825) 28(2,2.825) 29(1.5,2.825) 30(1,2.825) 31(0.5,2.825) 32(0,2.825) 33(-0.5,2.825) 34(-1,2.825) 35(-1.5,2.825) 36(-2,2.825)
  rect 3x3 smd: 37(0,0)
  silkscreen extent -3.21,-3.21 3.21,3.21, body extent -3.07,-3.07 3.07,3.07, height 1
TC2030-IDC-NL [mm] "Tag-Connect 6-Pin with No Legs (PN# TC2030-IDC-NL)"
  round 0.991 hole 0.991 unplated: 0(0,0) 0(5.08,-1.016) 0(5.08,1.016)
  round 0.79 smd paste-0.39: 1(1.27,-0.635) 2(1.27,0.635) 3(2.54,-0.635) 4(2.54,0.635) 5(3.89,-0.635) 6(3.81,0.635)

## Part data
C1 C11: library part CC0402_10NF_16V_10%_X7R, "Non-polarised capacitor", Case=0402, Manufacturer=GENERIC, Manufacturer1 ComponentHeight=0.55mm, Manufacturer1 Example=PHYCOMP, Manufacturer1 Part Number=223878715636, Tolerance=±10%, Voltage=16V, Author="CERN DEM JLC", Component Type=Standard, CreateDate=03.12.2007, HelpURL=\\cern.ch\dfs\Applications\Altium\Datasheets\CC0402_X7R_PHYCOMP.pdf, LatestRevisionDate=03.12.2007, Manufacturer Part Number=CC0402_10NF_16V_10%_X7R, Mounted=Yes, Part Description="SMD Multilayer Chip Ceramic Capacitor", Part Number=CC0402_10NF_16V_10%_X7R, Pin Count=2, Sense=No, SMD=Yes, Socket=No, Status="Not Recommended", TC=X7R
C2 C3 C4 C13 C14 C15 C23 C26 C27: library part CC0402_100NF_16V_10%_X7R, "Non-polarised capacitor", Case=0402, Manufacturer=GENERIC, Manufacturer1 ComponentHeight=0.55mm, Manufacturer1 Example=MURATA, Manufacturer1 Part Number=GRM155R71C104KA88D, Tolerance=±10%, Voltage=16V, Author="CERN DEM JLC", Component Type=Standard, CreateDate=05.12.2013, HelpURL=\\cern.ch\dfs\Applications\Altium\Datasheets\CC0402_X7R_MURATA_GRM.pdf, LatestRevisionDate=03.12.2007, Manufacturer Part Number=CC0402_100NF_16V_10%_X7R, Mounted=Yes, Part Description="SMD Multilayer Chip Ceramic Capacitor", Part Number=CC0402_100NF_16V_10%_X7R, Pin Count=2, Sense=No, SMD=Yes, Socket=No, Status="Not Recommended", TC=X7R
C5 C6: library part CC0603_1UF_16V_10%_X7R, "Non-polarised capacitor", Case=0603, Manufacturer=GENERIC, Manufacturer1 ComponentHeight=0.9mm, Manufacturer1 Example="YAGEO PHYCOMP", Manufacturer1 Part Number=223878615663, Tolerance=±10%, Voltage=16V, Author="CERN DEM JLC", Component Type=Standard, CreateDate=03.12.2007, HelpURL=\\cern.ch\dfs\Applications\Altium\Datasheets\CC0603_X7R_PHYCOMP.pdf, LatestRevisionDate=17.04.2015, Manufacturer Part Number=CC0603_1UF_16V_10%_X7R, Mounted=Yes, Part Description="SMD Multilayer Chip Ceramic Capacitor", Part Number=CC0603_1UF_16V_10%_X7R, Pin Count=2, Sense=No, SMD=Yes, Socket=No, Status=None, TC=X7R
C7 C8 C9 C12: library part CC0603_4.7UF_16V_10%_X5R, "Non-polarised capacitor", Case=0603, Manufacturer=GENERIC, Manufacturer1 ComponentHeight=0.95mm, Manufacturer1 Example="TAIYO YUDEN", Manufacturer1 Part Number=EMK107ABJ475KA-T, Tolerance=±10%, Voltage=16V, Author="CERN DEM JLC", Component Type=Standard, CreateDate=16.12.2013, HelpURL=\\cern.ch\dfs\Applications\Altium\Datasheets\CC0603_X7R_TAIYO-YUDEN_HIGH-VALUE.pdf, LatestRevisionDate=16.09.2014, Manufacturer Part Number=CC0603_4.7UF_16V_10%_X5R, Mounted=Yes, Part Description="SMD Multilayer Chip Ceramic Capacitor", Part Number=CC0603_4.7UF_16V_10%_X5R, Pin Count=2, Sense=No, SMD=Yes, Socket=No, Status=None, TC=X5R
C10: library part CC0402_1UF_16V_10%_X5R, "Non-polarised capacitor", Case=0402, Manufacturer=GENERIC, Manufacturer1 ComponentHeight=0.55mm, Manufacturer1 Example=TDK, Manufacturer1 Part Number=C1005X5R1C105KT, Tolerance=±10%, Voltage=16V, Author="CERN DEM JLC", Component Type=Standard, CreateDate=25.10.2012, HelpURL=\\cern.ch\dfs\Applications\Altium\Datasheets\CC0402_X5R_TDK_C.pdf, LatestRevisionDate=25.10.2012, Manufacturer Part Number=CC0402_1UF_16V_10%_X5R, Mounted=Yes, Part Description="SMD Multilayer Chip Ceramic Capacitor", Part Number=CC0402_1UF_16V_10%_X5R, Pin Count=2, Sense=No, SMD=Yes, Socket=No, Status=Preferred, TC=X5R
C16: library part CC0603_10UF_10V_10%_X5R, "Non-polarised capacitor", Case=0603, Manufacturer=GENERIC, Manufacturer1 ComponentHeight=0.8mm, Manufacturer1 Example=MURATA, Manufacturer1 Part Number=GRM188R61A106KE69D, Tolerance=±10%, Voltage=10V, Author="CERN DEM JLC", Component Type=Standard, CreateDate=31.01.2017, HelpURL=\\cern.ch\dfs\Applications\Altium\Datasheets\CC0603_MURATA_GRM188R61A106KE69D.pdf, LatestRevisionDate=31.01.2017, Manufacturer Part Number=CC0603_10UF_10V_10%_X5R, Mounted=Yes, Part Description="SMD Multilayer Chip Ceramic Capacitor", Part Number=CC0603_10UF_10V_10%_X5R, Pin Count=2, Sense=No, SMD=Yes, Socket=No, Status=None, TC=X5R
C17: library part CC0805_10UF_35V_10%_X5R_MURATA_GRM21BR6YA106KE43L, "Non-polarised capacitor", Case=0805, Manufacturer=MURATA, Manufacturer Part Number=GRM21BR6YA106KE43, Tolerance=±10%, Voltage=35V, Author="CERN DEM BC", Component Type=Standard, ComponentHeight=1.45mm, CreateDate=24.03.2020, HelpURL=\\cern.ch\dfs\Applications\Altium\Datasheets\CC0805_MURATA_GRM21BR6YA106KE43L.pdf, LatestRevisionDate=24.03.2020, Mounted=Yes, Part Description="Chip Multilayer Ceramic Capacitor for General Purpose", Part Number=CC0805_10UF_35V_10%_X5R_MURATA_GRM21BR6YA106KE43L, Pin Count=2, Sense=No, SMD=Yes, Socket=No, Status="Not Recommended", TC=X5R
C18 C19: library part CC0402_100NF_50V_10%_X7R, "Non-polarised capacitor", Part Number=CC0402_100NF_50V_10%_X7R
C20 C21: library part CC0805_220NF_100V_10%_X7R, "Non-polarised capacitor", Case=0805, Manufacturer=GENERIC, Manufacturer1 ComponentHeight=1mm, Manufacturer1 Example=MURATA, Manufacturer1 Part Number=GRM21AR72A224KAC5L, Tolerance=±10%, Voltage=100V, Author="CERN DEM JLC", Component Type=Standard, CreateDate=08.06.2017, HelpURL=\\cern.ch\dfs\Applications\Altium\Datasheets\CC0805_MURATA_GRM21AR72A224KAC5L.pdf, LatestRevisionDate=08.06.2017, Manufacturer Part Number=CC0805_220NF_100V_10%_X7R, Mounted=Yes, Part Description="SMD Multilayer Chip Ceramic Capacitor", Part Number=CC0805_220NF_100V_10%_X7R, Pin Count=2, Sense=No, SMD=Yes, Socket=No, Status=Preferred, TC=X7R
C22 C24 C25: library part CC0402_2.2UF_6.3V_10%_X5R, "Non-polarised capacitor", Part Number=CC0402_2.2UF_6.3V_10%_X5R
D1: "Diode Zener Anode Pin 1 Cathode Pin 3 (Pas de pin 2)", Case=SOT23-3, Manufacturer="FAIRCHILD SEMICONDUCTOR", Power=350mW, Voltage=7V5, Author="CERN DEM JLC", Bonding=No, Component Type=Standard, ComponentHeight=1.3mm, CreateDate=04.07.2013, Device=BZX84C7V5, HelpURL=\\cern.ch\dfs\Applications\Altium\Datasheets\BZX84C7V5.pdf, LatestRevisionDate=04.07.2013, Manufacturer Part Number=BZX84C7V5, Mounted=Yes, PackageDescription="SOT, 0.95mm Pitch; 3 Pin, 1.30mm W X 2.90mm L X 1.30mm H, body IPC Medium Density", Part Description="Zener Diode", Part Number=BZX84C7V5, Pin Count=3, PressFit=No, Sense=No, SMD=Yes, Socket=No
D2: "Schottky Diode", Case=SOD-323, Manufacturer="ON SEMICONDUCTOR", Manufacturer Part Number=BAT54H, Power=200mA, Voltage=30V, Author="CERN DEM BC", Bonding=No, Component Type=Standard, ComponentHeight=1mm, CreateDate=30.09.2019, Device=BAT54HT1G, HelpURL=\\cern.ch\dfs\Applications\Altium\Datasheets\BAT54HT1G.pdf, LatestRevisionDate=24.05.2022, Mounted=Yes, PackageDescription="SOD-323 Diode; 1.70mm W X 1.25mm L X 1.00mm H Body, IPC Medium Density", Part Description="30V Silicon Hot-Carrier Detector and Switching Diode", Part Number=BAT54HT1G, Pin Count=2, PressFit=No, Sense=No, SMD=Yes, Socket=No
D3: library part D_TVS_DRTR5V0U4S-7, "Integrated Quad Ultra-Low Capacitance ESD Protection", Case=SOT363, Manufacturer=DIODES, Author=GK, Bonding=No, Component Type=Standard, ComponentHeight=1.1mm, CreateDate=24.01.2017, Device=DRTR5V0U4S-7, HelpURL=\\cern.ch\dfs\Applications\Altium\Datasheets\PRTR5V0U4Y.pdf, LatestRevisionDate=14.09.2020, Manufacturer Part Number=DRTR5V0U4S-7, Mounted=Yes, PackageDescription="SOT363, SC70-6, 0.65mm Pitch; 6 Pin, 1.25mm W X 2.00mm L X 1.10mm H body, IPC Medium Density", Part Description="Integrated Quad Ultra-Low Capacitance ESD (±8kV) Protection", Part Number=DRTR5V0U4S-7, Pin Count=6, PressFit=No, Sense=No, SMD=Yes, Socket=No, Status=Active, Status Comment=Active
D4 D5: "Ultra-Low Capacitance ESD Protection Ultra-Low Capacitance ESD Protection", Clamping Voltage=48V, Manufacturer="ON Semiconductor", Max Operating Temperature=150°C, Min Breakdown Voltage=24.3V, Min Operating Temperature=-55°C, Power Line Protection=No, Resistor Type=Zener, Reverse Standoff Voltage=24V, Supplier Part Number 1=863-ESD7241N2T5G, Category="ESD and Circuit Protection ICs", ComponentLink1Description=http://www.farnell.com/datasheets/2907080.pdf?src-supplier=Farnell, ComponentLink1URL=http://www.farnell.com/datasheets/2907080.pdf?src-supplier=Farnell, ComponentLink2Description=http://www.onsemi.com/pub/Collateral/ESD7241-D.PDF?src-supplier=Digi-Key, ComponentLink2URL=http://www.onsemi.com/pub/Collateral/ESD7241-D.PDF?src-supplier=Digi-Key, Manufacturer Part Number=ESD7241N2T5G, Mount="Surface Mount", Number of Bidirectional Channels=1, Number of Pins=2, Packaging="Cut Tape", Pricing 1="1=0,37000, 10=0,30200, 50=0,30200, 100=0,20600, 1000=0,11600, 10000=0,09300 (USD)", RoHS=Yes, Stock 1=26036, Supplier 1=Mouser
IC1: "ARM Cortex-M3 32-bit MCU, 64 KB Flash, 20 KB Internal RAM, 26 I/Os, 36-pin VFQFPN, -40 to 85 degC, Tray", I/Os (High Current)=26, Operating Frequency(F) (Processor speed) (MHz)=72, Supply Voltage(Vcc) min (V)=2, A/D Converter="2x12-bit (10 Channel)", ComponentLink1Description="Manufacturer URL", ComponentLink1URL=http://www.st.com/web/en/home.html, ComponentLink2Description=Datasheet, ComponentLink2URL=http://www.st.com/st-web-ui/static/active/en/resource/technical/document/datasheet/CD00161566.pdf, ComponentLink3Description="Package Specification", ComponentLink3URL=http://www.st.com/st-web-ui/static/active/en/resource/technical/document/datasheet/CD00161561.pdf, Core="ARM Cortex-M3", DatasheetVersion="Rev. 16", FLASH Size (Prog) (kB)=64, Internal RAM Size (kB)=20, Mounting Technology="Surface Mount", PackageDescription="36-Pin Quad Flat No-Lead, 6 x 6 x 1.0 mm Body, 0.5 mm Pitch, Exposed Pad", PackageReference=VFQFPN36, PackageVersion="Rev. 16, 08/2013", Packing=Tray, PartNumber=STM32F103T8U6
IC2: "DAC 2-CH Resistor-String 8-bit 16-Pin QFN EP Tube", Manufacturer=Microchip, Supplier Part Number 1=MCP47CMB02-E/MG-ND, Category="Digital to Analog Converters (DACs)", ComponentLink1Description=http://www.microchip.com/mymicrochip/filehandler.aspx?ddocname=en607627&src-supplier=Digi-Key, ComponentLink1URL=http://www.microchip.com/mymicrochip/filehandler.aspx?ddocname=en607627&src-supplier=Digi-Key, Manufacturer Part Number=MCP47CMB02-E/MG, Pricing 1="1=1,66000, 25=1,38880, 100=1,29000 (USD)", RoHS=No, Stock 1=452, Supplier 1=Digi-Key
IC3: "Precision Linear Voltage Regulator Positive 5V 1A 6-Pin WSON T/R", Manufacturer="Texas Instruments", Supplier Part Number 1=296-TLV76750DRVRCT-ND, Category="Voltage Regulators - Linear", ComponentLink1Description=http://www.ti.com/general/docs/suppproductinfo.tsp?distId=10&amp;gotoUrl=http%3A%2F%2Fwww.ti.com%2Flit%2Fgpn%2Ftlv767&src-supplier=Digi-Key, ComponentLink1URL=http://www.ti.com/general/docs/suppproductinfo.tsp?distId=10&amp;gotoUrl=http%3A%2F%2Fwww.ti.com%2Flit%2Fgpn%2Ftlv767&src-supplier=Digi-Key, Manufacturer Part Number=TLV76750DRVR, Pricing 1="1=0,92000, 10=0,82200, 25=0,78040, 100=0,64120, 250=0,59936, 500=0,52968, 1000=0,42080 (USD)", RoHS=Yes, Stock 1=13794, Supplier 1=Digi-Key
IC4: "LDO Regulator, 300 mA, Low Iq, High PSRR, High Accuracy 3.3V, TSOP5, Active Discharge, Normal Vout Slew-Rate", Manufacturer="ON Semiconductor", Supplier Part Number 1=3280613, Category="Voltage Regulators - Linear", Manufacturer Part Number=NCP115ASN330T2G, RoHS=Yes, RoHS Compliant=No, Stock 1=6044, Supplier 1=Farnell
IC5: "Ethernet Controller, 10 Mb/s, Single-Pair, MAC + PHY, 802.3cg, 10BASE−T1S Compliant", Manufacturer="ON Semiconductor", Manufacturer Part Number=NCN26010XMNTXG, Pricing 1="1=7,29220, 10=6,57460, 25=6,24800, 100=5,59360, 250=5,34180 (USD)", RoHS=No, Stock 1=369, Supplier 1="Arrow Electronics", Supplier Part Number 1=NCN26010XMNTXG
ICSP1: "Tag-Connect 6-Pin with No Legs"
J1: "Conn MCX F 50Ohm Solder ST Thru-Hole Gold T/R", Manufacturer=Molex, Supplier Part Number 1=WM14943CT-ND, Category="RF / Coaxial Connectors", ComponentLink1Description=http://www.molex.com/pdm_docs/sd/733660062_sd.pdf?src-supplier=Digi-Key, ComponentLink1URL=http://www.molex.com/pdm_docs/sd/733660062_sd.pdf?src-supplier=Digi-Key, Manufacturer Part Number=0733660062, Pricing 1="1=2,93000, 10=2,57800, 100=2,05030 (USD)", RoHS=Yes, Stock 1=4164, Supplier 1=Digi-Key
J2: "Conn Mini USB Type B RCP 5 POS 0.8mm Solder ST Thru-Hole 5 Terminal 1 Port USB 2.0 Tray", Manufacturer=Molex, Supplier Part Number 1=3051509, Category="USB Connectors", ComponentLink1Description=https://datasheet.ciiva.com/12494/5022370517-sd-129854-12494635.pdf?src-supplier=Mouser, ComponentLink1URL=https://datasheet.ciiva.com/12494/5022370517-sd-129854-12494635.pdf?src-supplier=Mouser, ComponentLink2Description=https://datasheet.ciiva.com/3094/5022370517-sd-3094984.pdf?src-supplier=Avnet, ComponentLink2URL=https://datasheet.ciiva.com/3094/5022370517-sd-3094984.pdf?src-supplier=Avnet, ComponentLink3Description=https://datasheet.ciiva.com/851/5022370517-sd-851837.pdf?src-supplier=Digi-Key, ComponentLink3URL=https://datasheet.ciiva.com/851/5022370517-sd-851837.pdf?src-supplier=Digi-Key, Manufacturer Part Number=5022370517, RoHS=Yes, Stock 1=3624, Supplier 1=Farnell
J3: "0.80mm Pitch Header Surface Mount Dual Row Vertical Stacking 4.50 and 5.50mm Stacking Heights 16 Circuits", Manufacturer=Molex, Supplier Part Number 1=3499278, Category="Headers and Wire Housings", ComponentLink1Description=https://datasheet.ciiva.com/5130/0533071671-pcb-headers-170920-5130475.pdf?src-supplier=Mouser, ComponentLink1URL=https://datasheet.ciiva.com/5130/0533071671-pcb-headers-170920-5130475.pdf?src-supplier=Mouser, ComponentLink2Description=https://datasheet.ciiva.com/1440/1875052-1440388.pdf?src-supplier=Element14, ComponentLink2URL=https://datasheet.ciiva.com/1440/1875052-1440388.pdf?src-supplier=Element14, ComponentLink3Description=https://datasheet.ciiva.com/10079/0533071671-pcb-headers-10079144.pdf?src-supplier=Avnet, ComponentLink3URL=https://datasheet.ciiva.com/10079/0533071671-pcb-headers-10079144.pdf?src-supplier=Avnet, Manufacturer Part Number=53307-1671, RoHS=Yes, Stock 1=7000, Supplier 1=Farnell
L1 L2: library part IND0402_MURATA_BLM15HD601SN1, Case=0402, Manufacturer=MURATA, Manufacturer Part Number=BLM15HD601SN1D, Power=300mA, Resistance=0.85R, Tolerance=±25%, Author="CERN DEM JLC", Component Type=Standard, ComponentHeight=0.55mm, CreateDate=28.02.2012, HelpURL=\\cern.ch\dfs\Applications\Altium\Datasheets\IND0402_MURATA_BLM15H.pdf, LatestRevisionDate=25.10.2018, Mounted=Yes, Part Description="SMD EMIFIL Suppression Chip Ferrite Bead", Part Number=IND0402_MURATA_BLM15HD601SN1, Pin Count=2, Sense=No, SMD=Yes, Socket=No, Status=None
L3: library part IND_MURATA_DLW21SN900SQ2L, "Inductor Common Mode", Case=0805, Manufacturer=MURATA, Manufacturer Part Number=DLW21SN900SQ2L, Power=330mA, Resistance=0.35R, Tolerance=±25%, Author="CERN DEM JLC", Component Type=Standard, ComponentHeight=1.4mm, CreateDate=01.07.2014, HelpURL=\\cern.ch\dfs\Applications\Altium\Datasheets\IND_MURATA_DLW21S.pdf, LatestRevisionDate=01.07.2014, Mounted=Yes, Part Description="Wire Wound Common Mode Choke Coil (DLW21S Series)", Part Number=IND_MURATA_DLW21SN900SQ2L, Pin Count=4, Sense=No, SMD=Yes, Socket=No, Status=None
L4: library part IND_3.3UH_20%_COILCRAFT_LPD5030, "Inductor Common Mode", Manufacturer=COILCRAFT, Manufacturer Part Number=LPD5030-154MRC, Power=0.28A, Resistance=2R43, Tolerance=±20%, Author="CERN DEM JLC", Component Type=Standard, ComponentHeight=1.2mm, CreateDate=25.09.2018, HelpURL=\\cern.ch\dfs\Applications\Altium\Datasheets\IND_COILCRAFT_LPD5030.pdf, LatestRevisionDate=25.09.2018, Mounted=Yes, Part Description="Coupled Inductors for SEPIC Applications, LPD5030 Series", Part Number=LPD5030-154MRC, Pin Count=2, Sense=No, SMD=Yes, Socket=No
L5: library part CMP-06045-000003-1, "200UH-20%/+50% (AT 0.1MHZ)70MA R", Inductance=200uH, Manufacturer=Murata, Package=0, Rms Current=70mA, Series Resistance=4.8Ω, Temperature="-40°C to +125°C", Temperature Range High=+125°C, Temperature Range Low=-40°C, Test Frequency=0.1MHz, Tolerance=-20/+50%, Automotive=Yes, Automotive Grade="Grade 1", Category=Ind, ComponentLink2Description=Datasheet, ComponentLink2URL=https://www.murata.com/products/productdata/8801029685278/QFLC9124.pdf?1544104811000, Composition=Wirewound, Device Class L1="Passive Components", Device Class L2="EMI / RFI Components", Device Class L3="Common Mode Chokes", Digikey Description="200UH-20%/+50% (AT 0.1MHZ)70MA R", Height=2.5mm, Lead Free=Yes, Manufacturer Part Number=DLW32MH201XK2L, Mouser Description="Common Mode Chokes Dual 200uH 100kHz 0.07A 4.8Ohm DCR SMD Automotive T/R", Octopart=https://octopart.com/dlw32mh201xk2l-murata-91401020, RoHS=TRUE
L6: library part IND0603_WURTH_74279266, Case=0603, Manufacturer="WURTH ELEKTRONIK", Manufacturer Part Number=74279266, Power=200mA, Resistance=0.6R, Tolerance=±25%, Author="CERN DEM JLC", Component Type=Standard, ComponentHeight=1mm, CreateDate=08.03.2011, HelpURL=\\cern.ch\dfs\Applications\Altium\Datasheets\IND0603_WURTH_74279266.pdf, LatestRevisionDate=25.10.2018, Mounted=Yes, Part Description="SMD EMI Suppression Chip Ferrite Bead (WE-CBF Series)", Part Number=IND0603_WURTH_74279266, Pin Count=2, Sense=No, SMD=Yes, Socket=No
LD1: library part LED_LITEON_LTST-C193KGKT-5A, "LED Green 1C 2A", Case=0603, Manufacturer="LITE-ON SEMICONDUCTOR", Manufacturer Part Number=LTST-C193KGKT-5A, Author="CERN DEM BC", Bonding=No, Color=Green, Component Type=Standard, ComponentHeight=0.35mm, CreateDate=11.11.2020, HelpURL=\\cern.ch\dfs\Applications\Altium\Datasheets\LED_LITEON_LTST-C193KGKT-5A.pdf, LatestRevisionDate=11.11.2020, Mounted=Yes, PackageDescription="SMD AlInGaP Green LED, Lens Water Clear, 2-Leads, Body 1.6x0.8mm", Part Description="Extra Thin SMD Chip LED, Ultra Bright AlInGaP Green, Lens Water Clear", Part Number=LED_LITEON_LTST-C193KGKT-5A, Pin Count=2, PressFit=No, Sense=No, SMD=Yes, Socket=No
LD2: library part LED_LITEON_LTST-C193KSKT-5A, "LED Yellow 1C 2A", Case=0603, Manufacturer="LITE-ON SEMICONDUCTOR", Manufacturer Part Number=LTST-C193KSKT-5A, Author="CERN DEM BC", Bonding=No, Color=Yellow, Component Type=Standard, ComponentHeight=0.35mm, CreateDate=11.11.2020, HelpURL=\\cern.ch\dfs\Applications\Altium\Datasheets\LED_LITEON_LTST-C193KSKT-5A.pdf, LatestRevisionDate=11.11.2020, Mounted=Yes, PackageDescription="SMD AlInGaP Yellow LED, Lens Water Clear, 2-Leads, Body 1.6x0.8mm", Part Description="Extra Thin SMD Chip LED, Ultra Bright AlInGaP Yellow, Lens Water Clear", Part Number=LED_LITEON_LTST-C193KSKT-5A, Pin Count=2, PressFit=No, Sense=No, SMD=Yes, Socket=No
OSC1: library part OSC_25MHZ_ABRACON_ASE-25.000MHZ-LC, "Oscillator 4 pins 1=STBY 2=GND 3=OUT 4=VDD", Manufacturer=ABRACON, Manufacturer Part Number=ASE-8.000MHZ-E-T, Author="CERN DEM HF", Bonding=No, Component Type=Standard, ComponentHeight=1.2mm, CreateDate=11.01.2022, HelpURL=\\cern.ch\dfs\Applications\Altium\Datasheets\XTAL_ABRACON_ASE.pdf, LatestRevisionDate=11.01.2022, Mounted=Yes, PackageDescription="SMD Oscillator, Body 3.20mm L X 2.50mm W X 1.20mm H, ASE Serie", Part Description="3.3V, ±50ppm, 15pF, -40..+85°C, CMOS SMD Crystal Oscillator, ASE Series", Part Number=ASE-8.000MHZ-E-T, Pin Count=4, PressFit=No, Sense=No, SMD=Yes, Socket=No
OSC2: library part OSC_25MHZ_ABRACON_ASE-25.000MHZ-LC, "Oscillator 4 pins 1=STBY 2=GND 3=OUT 4=VDD", Manufacturer=ABRACON, Manufacturer Part Number=ASE-25.000MHZ-LR-T, Author="CERN DEM HF", Bonding=No, Component Type=Standard, ComponentHeight=1.2mm, CreateDate=11.01.2022, HelpURL=\\cern.ch\dfs\Applications\Altium\Datasheets\XTAL_ABRACON_ASE.pdf, LatestRevisionDate=11.01.2022, Mounted=Yes, PackageDescription="SMD Oscillator, Body 3.20mm L X 2.50mm W X 1.20mm H, ASE Serie", Part Description="3.3V, ±50ppm, 15pF, -40..+85°C, CMOS SMD Crystal Oscillator, ASE Series", Part Number=ASE-25.000MHZ-LR-T, Pin Count=4, PressFit=No, Sense=No, SMD=Yes, Socket=No
P1: "WR-TBL Series 3470B PCB Header Vertical cable entry, THT, pitch 2.5mm, 2p", Manufacturer="Wurth Elektronik", Operating Temperature Max=105°C, Operating Temperature Min=-40°C, Rated Current=6A, Working Voltage=150V, Application="Plug Screwless Push In", Category="Terminal Blocks", ComponentLink1Description="Website Link", ComponentLink1URL=https://www.we-online.com/redexpert/article/691347000002B?ad, ComponentLink2Description="Datasheet Link", ComponentLink2URL=https://www.we-online.com/redexpert/spec/691347000002B?ad, Manufacturer Part Number=691347000002B, Match Code=WR-TBL, Modularity=No, Mount="Through Hole", Number of Pins=2, Number of Rows=1, Orientation="Vertical Cable Entry", Packaging=Carton, Pitch=2.5mm
R1 R2: library part R0402_4K7_1%_0.0625W_100PPM, "Resistor - 1%", Case=0402, Manufacturer=GENERIC, Manufacturer1 ComponentHeight=0.4mm, Manufacturer1 Example="YAGEO PHYCOMP", Manufacturer1 Part Number=232270674702L, Power=0.0625W, Tolerance=±1%, Author="CERN DEM JLC", Component Type=Standard, CreateDate=03.12.2007, HelpURL=\\cern.ch\dfs\Applications\Altium\Datasheets\R0402_Phycomp_RC0402.pdf, LatestRevisionDate=17.10.2012, Manufacturer Part Number=R0402_4K7_1%_0.0625W_100PPM, Mounted=Yes, Part Description="General Purpose Thick Film Chip Resistor", Part Number=R0402_4K7_1%_0.0625W_100PPM, Pin Count=2, PressFit=No, Sense=No, SMD=Yes, Socket=No, Status="Not Recommended", TC=±100ppm/°C
R3 R4 R5: library part R0402_100K_1%_0.0625W_100PPM, "Resistor - 1%", Case=0402, Manufacturer=GENERIC, Manufacturer1 ComponentHeight=0.4mm, Manufacturer1 Example="YAGEO PHYCOMP", Manufacturer1 Part Number=232270671004L, Power=0.0625W, Tolerance=±1%, Author="CERN DEM JLC", Component Type=Standard, CreateDate=03.12.2007, HelpURL=\\cern.ch\dfs\Applications\Altium\Datasheets\R0402_Phycomp_RC0402.pdf, LatestRevisionDate=17.10.2012, Manufacturer Part Number=R0402_100K_1%_0.0625W_100PPM, Mounted=Yes, Part Description="General Purpose Thick Film Chip Resistor", Part Number=R0402_100K_1%_0.0625W_100PPM, Pin Count=2, PressFit=No, Sense=No, SMD=Yes, Socket=No, Status="Not Recommended", TC=±100ppm/°C
R6 R7: library part R0402_1K5_1%_0.0625W_100PPM, "Resistor - 1%", Case=0402, Manufacturer=GENERIC, Manufacturer1 ComponentHeight=0.4mm, Manufacturer1 Example="YAGEO PHYCOMP", Manufacturer1 Part Number=232270671502L, Power=0.0625W, Tolerance=±1%, Author="CERN DEM JLC", Component Type=Standard, CreateDate=03.12.2007, HelpURL=\\cern.ch\dfs\Applications\Altium\Datasheets\R0402_Phycomp_RC0402.pdf, LatestRevisionDate=17.10.2012, Manufacturer Part Number=R0402_1K5_1%_0.0625W_100PPM, Mounted=Yes, Part Description="General Purpose Thick Film Chip Resistor", Part Number=R0402_1K5_1%_0.0625W_100PPM, Pin Count=2, PressFit=No, Sense=No, SMD=Yes, Socket=No, Status="Not Recommended", TC=±100ppm/°C
R8: library part R0402_10K_1%_0.0625W_100PPM, "Resistor - 1%", Case=0402, Manufacturer=GENERIC, Manufacturer1 ComponentHeight=0.4mm, Manufacturer1 Example="YAGEO PHYCOMP", Manufacturer1 Part Number=232270671003L, Power=0.0625W, Tolerance=±1%, Author="CERN DEM JLC", Component Type=Standard, CreateDate=03.12.2007, HelpURL=\\cern.ch\dfs\Applications\Altium\Datasheets\R0402_Phycomp_RC0402.pdf, LatestRevisionDate=17.10.2012, Manufacturer Part Number=R0402_10K_1%_0.0625W_100PPM, Mounted=Yes, Part Description="General Purpose Thick Film Chip Resistor", Part Number=R0402_10K_1%_0.0625W_100PPM, Pin Count=2, PressFit=No, Sense=No, SMD=Yes, Socket=No, Status="Not Recommended", TC=±100ppm/°C
R9: library part R0603_3K3_1%_0.1W_100PPM, "Resistor - 1%", Case=0603, Manufacturer=GENERIC, Manufacturer1 ComponentHeight=0.55mm, Manufacturer1 Example="NIC COMPONENT", Manufacturer1 Part Number=NRC06F3301TRF, Power=0.1W, Tolerance=±1%, Author="CERN DEM JLC", Component Type=Standard, CreateDate=03.12.2007, HelpURL=\\cern.ch\dfs\Applications\Altium\Datasheets\R0603_NIC_NRC.pdf, LatestRevisionDate=13.03.2008, Manufacturer Part Number=R0603_3K3_1%_0.1W_100PPM, Mounted=Yes, Part Description="General Purpose Thick Film Chip Resistor", Part Number=R0603_3K3_1%_0.1W_100PPM, Pin Count=2, PressFit=No, Sense=No, SMD=Yes, Socket=No, Status=Preferred, TC=±100ppm/°C
R10 R11: library part R0805_49R9_0.1%_0.125W_25PPM, "Resistor - 0.1%", Case=0805, Manufacturer=Vishay, Manufacturer1 ComponentHeight=0.6mm, Manufacturer1 Example=PANASONIC, Manufacturer1 Part Number=ERA6AEB49R9V, Manufacturer Part Number=MCU0805PD4999DP500, Power=0.125W, Tolerance=±0.5%, Author="CERN DEM JLC", Component Type=Standard, CreateDate=20.06.2011, HelpURL=\\cern.ch\dfs\Applications\Altium\Datasheets\R0805_PANASONIC_ERA.pdf, LatestRevisionDate=20.06.2011, Mounted=Yes, Part Description="Thin Film Chip Resistor", Part Number=MCU0805PD4999DP500, Pin Count=2, PressFit=No, Sense=No, SMD=Yes, Socket=No, TC=±25ppm
R12: library part R0402_3K3_1%_0.0625W_100PPM, "Resistor - 1%", Case=0402, Manufacturer=GENERIC, Manufacturer1 ComponentHeight=0.4mm, Manufacturer1 Example="YAGEO PHYCOMP", Manufacturer1 Part Number=232270673302L, Power=0.0625W, Tolerance=±1%, Author="CERN DEM JLC", Component Type=Standard, CreateDate=03.12.2007, HelpURL=\\cern.ch\dfs\Applications\Altium\Datasheets\R0402_Phycomp_RC0402.pdf, LatestRevisionDate=17.10.2012, Manufacturer Part Number=R0402_3K3_1%_0.0625W_100PPM, Mounted=Yes, Part Description="General Purpose Thick Film Chip Resistor", Part Number=R0402_3K3_1%_0.0625W_100PPM, Pin Count=2, PressFit=No, Sense=No, SMD=Yes, Socket=No, Status="Not Recommended", TC=±100ppm/°C
R13: library part R0402_2K_1%_0.0625W_100PPM, "Resistor - 1%", Case=0402, Manufacturer=GENERIC, Manufacturer1 ComponentHeight=0.4mm, Manufacturer1 Example="YAGEO PHYCOMP", Manufacturer1 Part Number=232270672002L, Power=0.0625W, Tolerance=±1%, Author="CERN DEM JLC", Component Type=Standard, CreateDate=03.12.2007, HelpURL=\\cern.ch\dfs\Applications\Altium\Datasheets\R0402_Phycomp_RC0402.pdf, LatestRevisionDate=17.10.2012, Manufacturer Part Number=R0402_2K_1%_0.0625W_100PPM, Mounted=Yes, Part Description="General Purpose Thick Film Chip Resistor", Part Number=R0402_2K_1%_0.0625W_100PPM, Pin Count=2, PressFit=No, Sense=No, SMD=Yes, Socket=No, Status="Not Recommended", TC=±100ppm/°C